# EAGLE board SP (EAGLE 9.4.2)
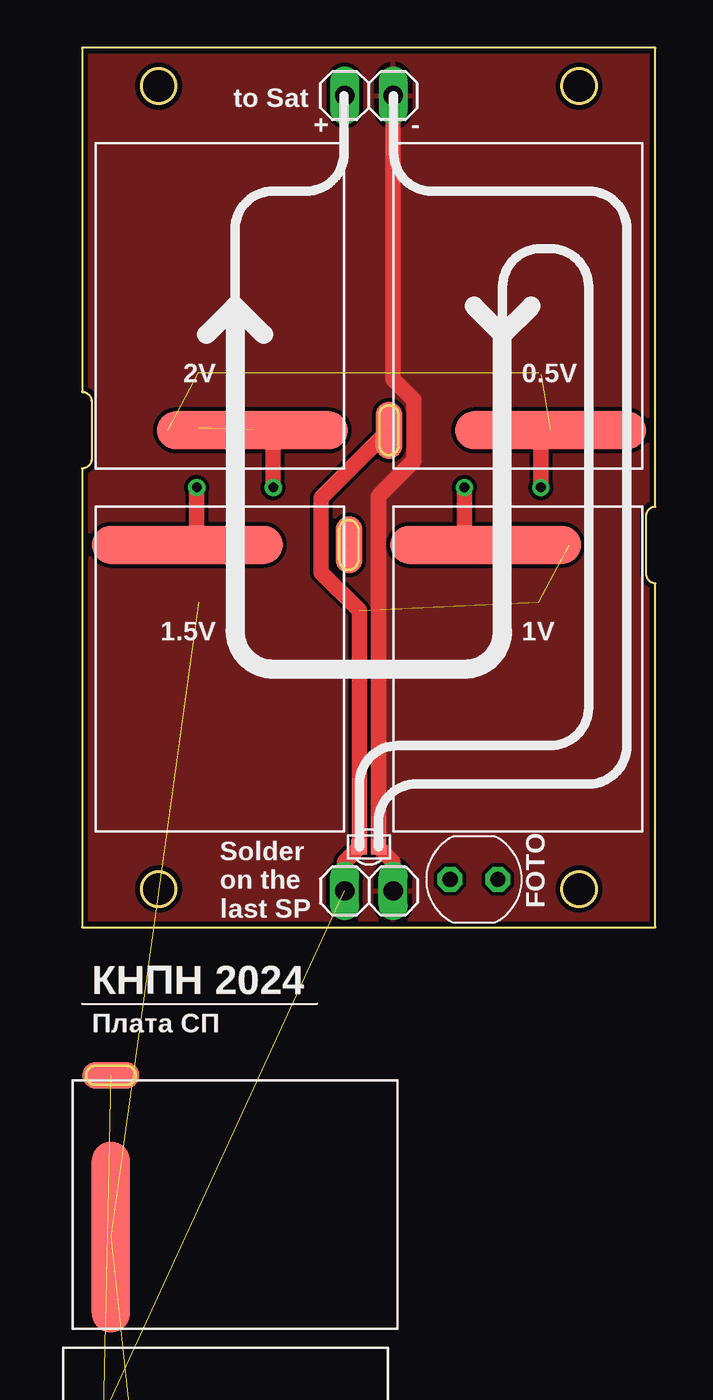
[diagram p0: board, top side]
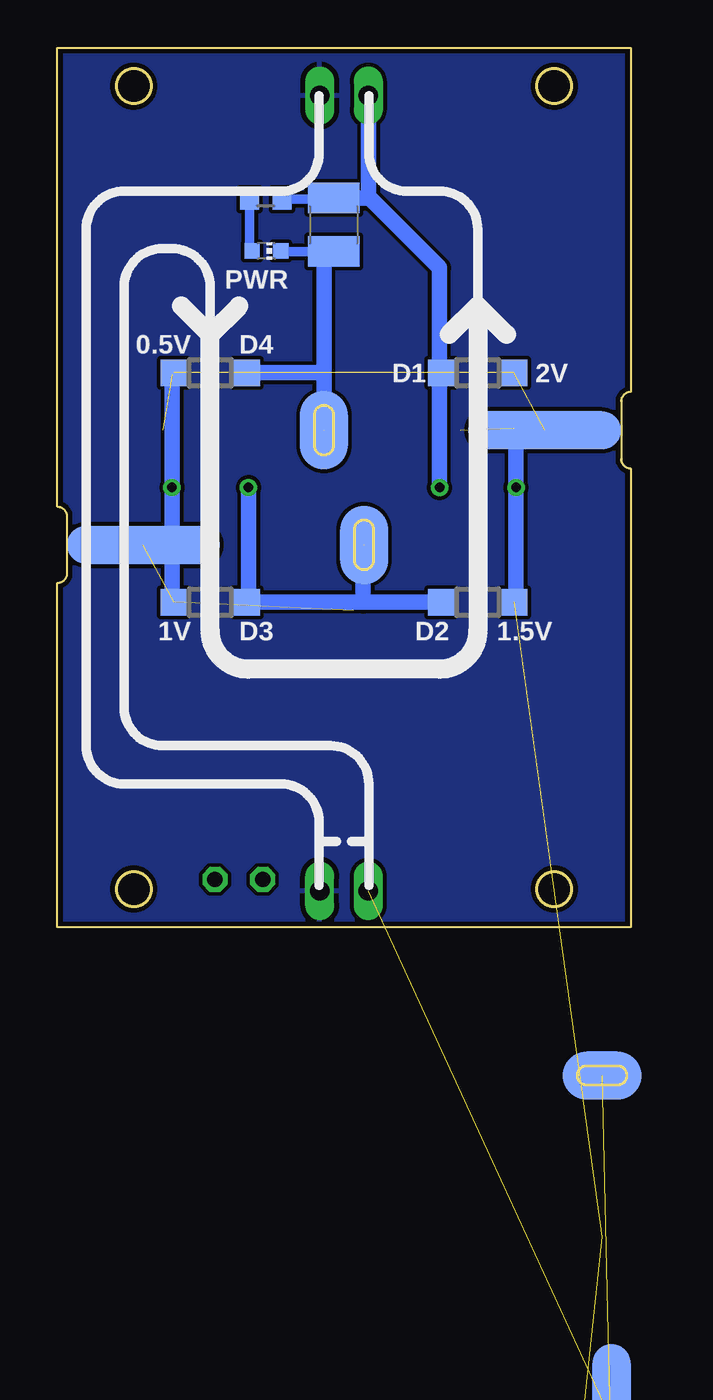
[diagram p1: board, bottom side, seen from below]

Size 30 x 46 mm. Coordinates in mm from the lower left corner, seen from the top.
Outline: 0,0 30,0 30,18 arc-90 29.5,18.5 29.5,21.5 arc-90 30,22 30,46 0,46 0,28 arc-90 0.5,27.5 0.5,24.5 arc-90 0,24 0,0
Outline: circle at 4,2 radius 0.9
Outline: circle at 26,2 radius 0.9
Outline: circle at 26,44 radius 0.9
Outline: circle at 4,44 radius 0.9
Copper layers (1*16): Top 0.035mm / dielectric 1.5mm / Bottom 0.035mm
Design rules "default *": minimum track width 0.25mm, minimum drill 0.35mm, track to track 0.2mm, track to pad 0.2mm, pad to pad 0.2mm, via to via 0.2mm, smd to smd 0.2mm, copper to edge 0.25mm, drill to drill 0.1mm, minimum pad ring 10mil, minimum via ring 8mil, stop-mask expansion 4mil, vias tented up to drill 0mil, thermal gap 10mil

## Footprints (pad centres in the part's own frame; a part is rotated, then mirrored left to right if it is on the bottom)
C1210 = smd 1.6 x 2.7: 1 -1.4,0; 2 1.4,0
SOD123 = smd 1.4 x 1.4: A 1.9,0; C -1.9,0
VT93N1-VERT = drill 0.8 octagon: P$1 -1.25,0; P$2 1.25,0
1X02 = drill 1.016 long: 1 -1.27,0; 2 1.27,0
CHIP-LED0603 = smd 0.8 x 0.8: A 0,-0.75; C 0,0.75
R0603 = smd 1 x 1.1: 1 -0.85,0; 2 0.85,0
SOLAR_1-2 = smd 2 x 10: IN-2 -6.5,-1.7 | smd 2 x 8 bottom: OUT -6.5,2.7
SOLAR_0-2 = smd 2 x 10: IN-2 -6.5,-1.7 | smd 4.1 x 2.5 bottom: OUT-2 -6.5,6.75 | smd 3 x 1.4: OUT-21 -6.5,6.75
VIAS-CONNECT = smd 0.8 x 0.8: 1 -0.5,0; 2 0.5,0

## Placement (x,y rotation side)
C1  47u  [C1210]  15.54,36.74 270 bottom
D1  MBR0520LT  [SOD123]  8,29 180 bottom
D2  MBR0520LT  [SOD123]  8,17 0 bottom
D3  MBR0520LT  [SOD123]  22,17 0 bottom
D4  MBR0520LT  [SOD123]  22,29 180 bottom
D5  MBR0520LT  [SOD123]  2,-38.5 0 top  (outside the outline)
D6  MBR0520LT  [SOD123]  14,-38.5 0 top  (outside the outline)
FOTO  VT93N1VERT  [VT93N1-VERT]  20.5,2.5 0 top
JP1  [1X02]  15,43.5 180 top
PWR  [CHIP-LED0603]  19.06,35.37 270 bottom
R1  2k7  [R0603]  19.1,38.09 180 bottom
SP-OUT  [1X02]  15,1.9 0 top
U$1  SOLAR-2_1  [SOLAR_1-2]  7.2,32.5 90 top
U$2  SOLAR-2_0  [SOLAR_0-2]  7.2,13.5 270 top
U$3  SOLAR-2_1  [SOLAR_1-2]  22.8,13.5 270 top
U$4  SOLAR-2_0  [SOLAR_0-2]  22.8,32.5 90 top
U$5  Плата СП  [LOGO]  0,-4 0 top  (outside the outline)
U$6  SOLAR-2_0  [SOLAR_0-2]  8,-14.5 0 top  (outside the outline)
U$7  [VIAS-CONNECT]  15,4.2 0 top
U$8  SOLAR-2_1  [SOLAR_1-2]  7.5,-28.5 0 top  (outside the outline)

## Library data of the parts
C1 = rcl; SPICEPREFIX: C
D1-D6 = diode
FOTO U$1-U$4 U$6-U$8 = KNPN-2023
JP1 SP-OUT = pinhead
PWR = led
R1 = rcl; SPICEPREFIX: R
U$5 = UNKNOWN-2024

## Nets
N$2: D2.C D3.A U$2.OUT-2 U$2.OUT-21 U$3.IN-2
N$3: D1.C D4.A U$1.OUT U$4.IN-2
N$4: PWR.A R1.2
N$8: D5.C D6.A U$6.OUT-2 U$6.OUT-21 U$8.IN-2
SP+: C1.1 D1.A D2.A D5.A JP1.2 R1.1 U$1.IN-2 U$2.IN-2 U$6.IN-2
SP+-: C1.2 D3.C D4.C D6.C PWR.C SP-OUT.1 U$3.OUT U$4.OUT-2 U$4.OUT-21 U$7.1 U$8.OUT
SP-: JP1.1 SP-OUT.2 U$7.2

## Tracks (layer width: path | path; a pad name or v marks a point on that pad's centre or on a via)
N$2  (via drill 0.5)  (1 unrouted)
  Top 0.8: U$3.IN-2 20,20 v20,23
  Bottom 0.8: D2.C 14,17 | 14,17 20,17 | 20,17 D3.A | U$2.OUT-21 14,19.95 14,17 | v20,23 20,17
N$3  (via drill 0.5)  (3 unrouted)
  Top 0.8: v24,23 24,25.5 U$4.IN-2
  Bottom 0.8: 24,17.1 24,20 24,28.9 D4.A
N$4
  Bottom 0.5: R1.2 19.95,35.51 PWR.A
N$8  (4 unrouted)
SP+  (via drill 0.5)  (3 unrouted)
  Top 0.8: U$1.IN-2 10,26 v10,23 | v6,23 6,20 U$2.IN-2
  Bottom 0.5: R1.1 15.59,38.09 C1.1
  Bottom 0.8: v10,23 10,29 | 10,29 10,34.5 13.64,38.14 13.73,38.14 | 13.73,38.14 C1.1 | D1.A 10,29 | JP1.2 13.73,38.14 | 6.1,26.1 6,26 v6,23 6,17.1 D2.A
SP+-  (5 unrouted)
  Top 0.8: 16,25.95 U$4.OUT-21 12.5,22.45 12.5,18.57 14.5,16.57 U$7.1 13.73,3.43 SP-OUT.1
  Bottom 0.5: PWR.C 18.28,35.34 C1.2 16.05,35.34
  Bottom 0.8: U$4.OUT-21 16.05,29 | 16.05,29 16.05,35.34 | D4.C 16.05,29
SP-
  Top 0.8: SP-OUT.2 16.27,3.43 U$7.2 15.5,22.57 17.35,24.42 17.35,27.58 16.27,28.66 JP1.1
  pour Top: -0.5,46.5 30.5,46.5 30.5,-0.5 -0.5,-0.5
  pour Bottom: -1,47 31,47 31,-1 -1,-1

## Text on the board
tPlace: 2V | 0.5V | 1.5V | 1V
bPlace: 0.5V | 2V | 1.5V | 1V
tNames: to Sat | + | - | Solder / on the / last SP